# Altium PCB Relay Controller REV1.PcbDoc
Units mm, origin at the board's own origin, x right, y up, seen from the top; angles counter-clockwise.
Board outline 101.06 x 103.5 mm, 2 copper layers (Top Layer, Bottom Layer); 33 components, 25 nets, 100 pads, 146 vias.
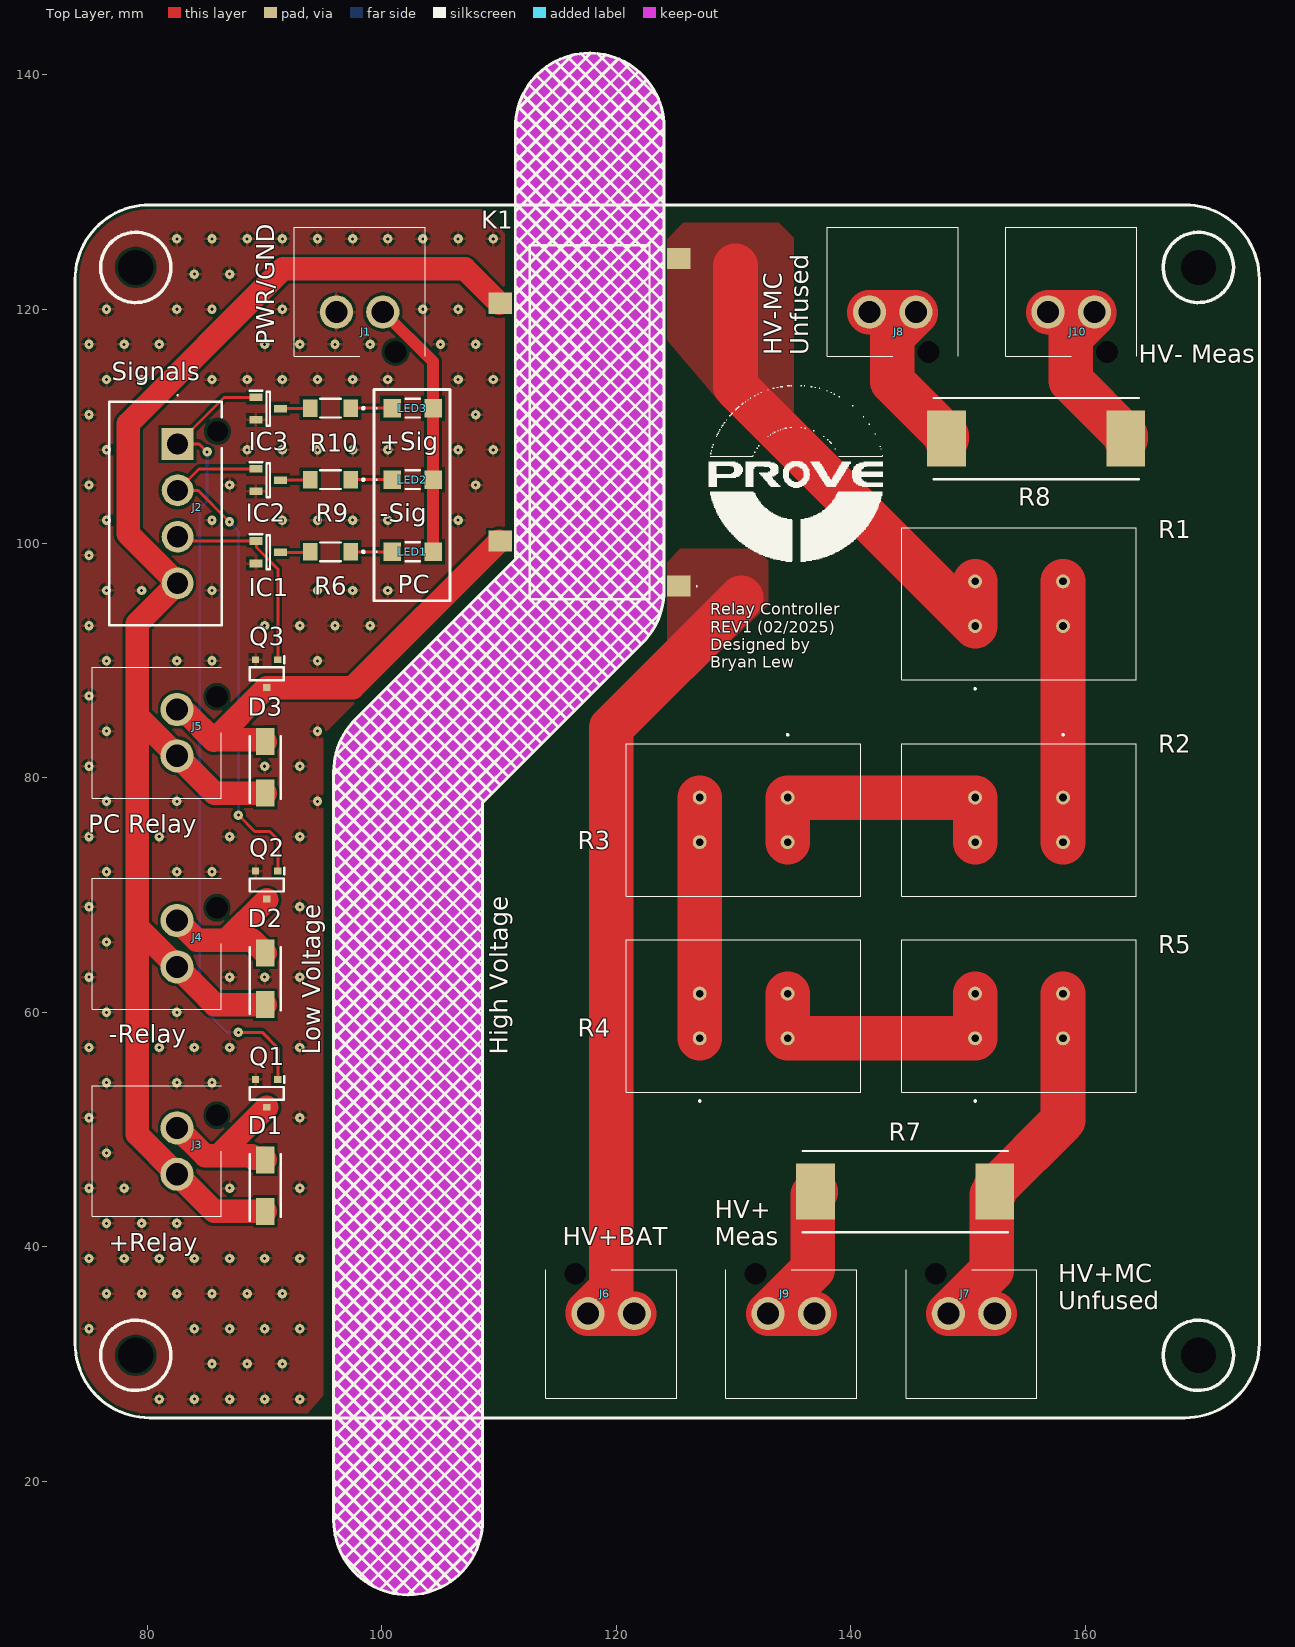
[diagram p0: Top Layer view]
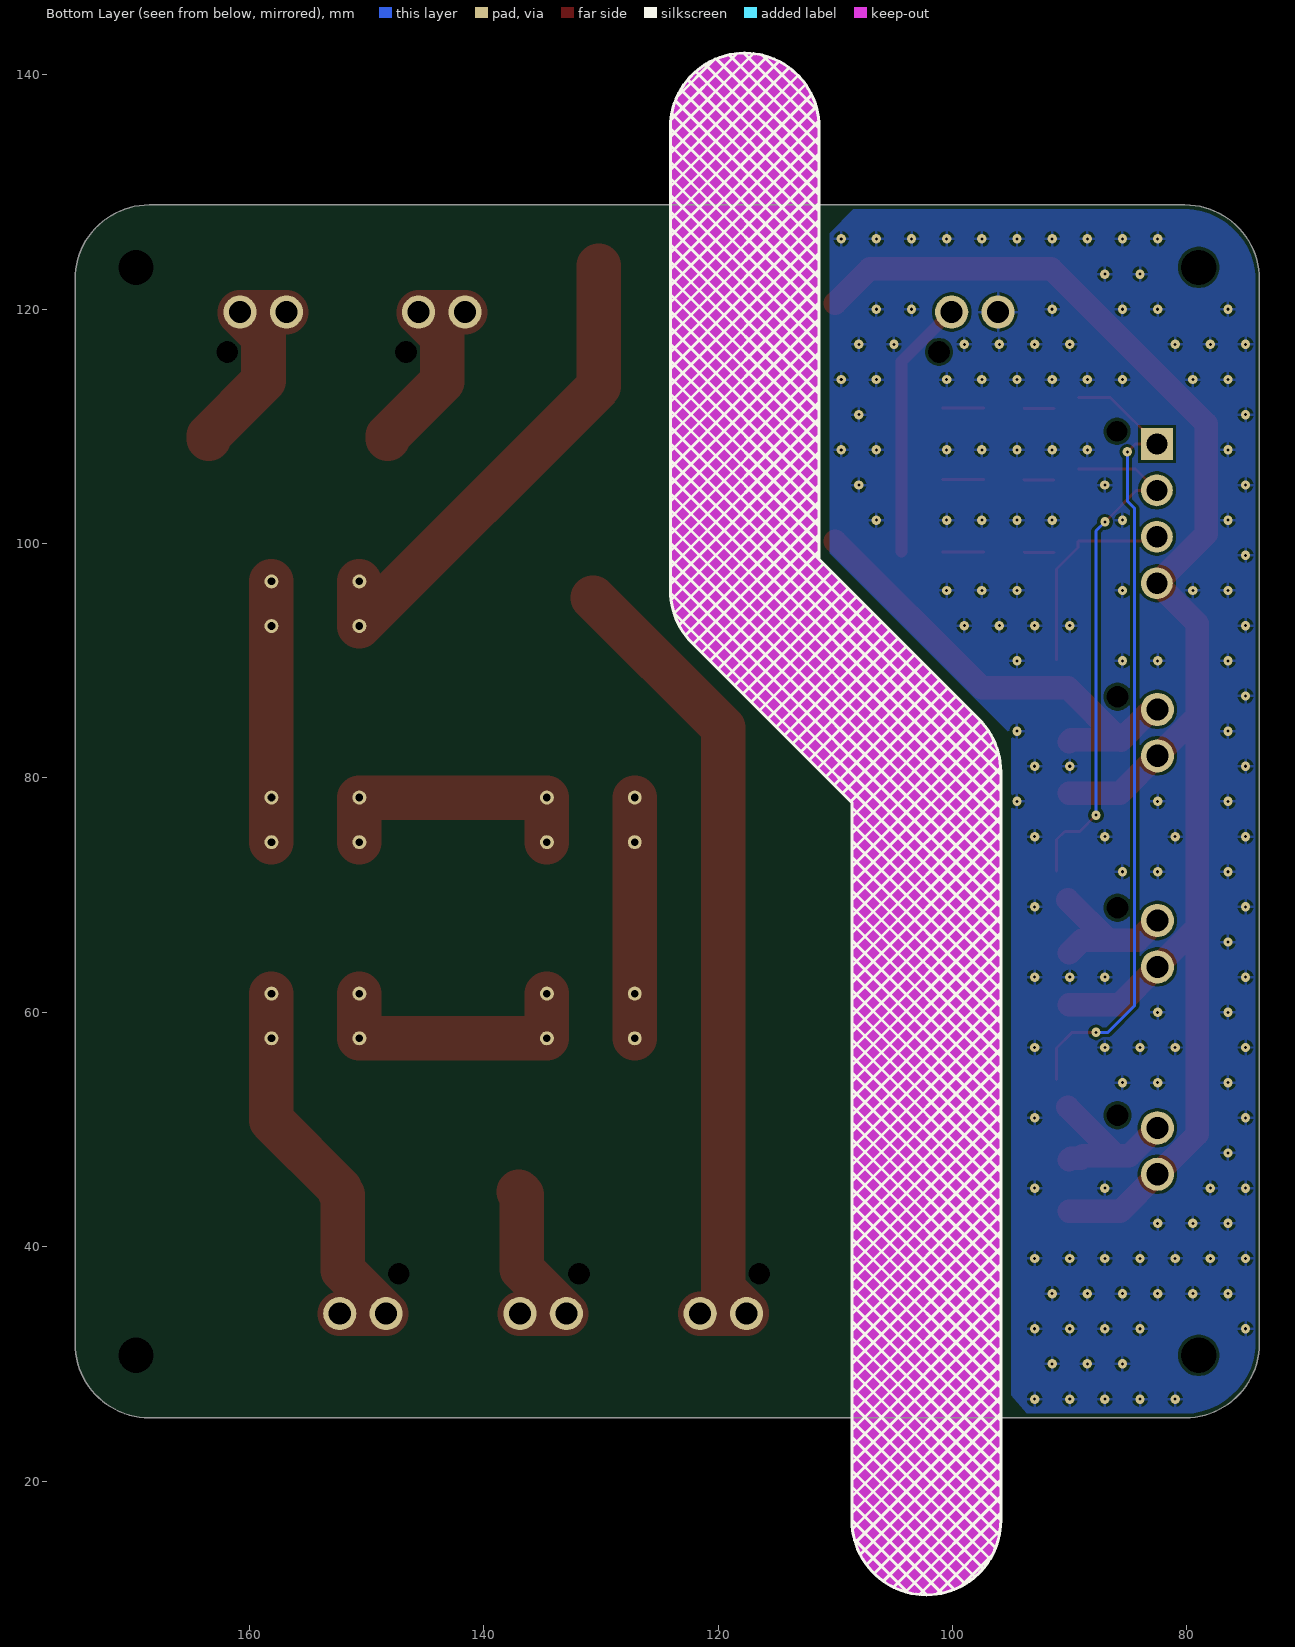
[diagram p1: Bottom Layer view, seen from below]
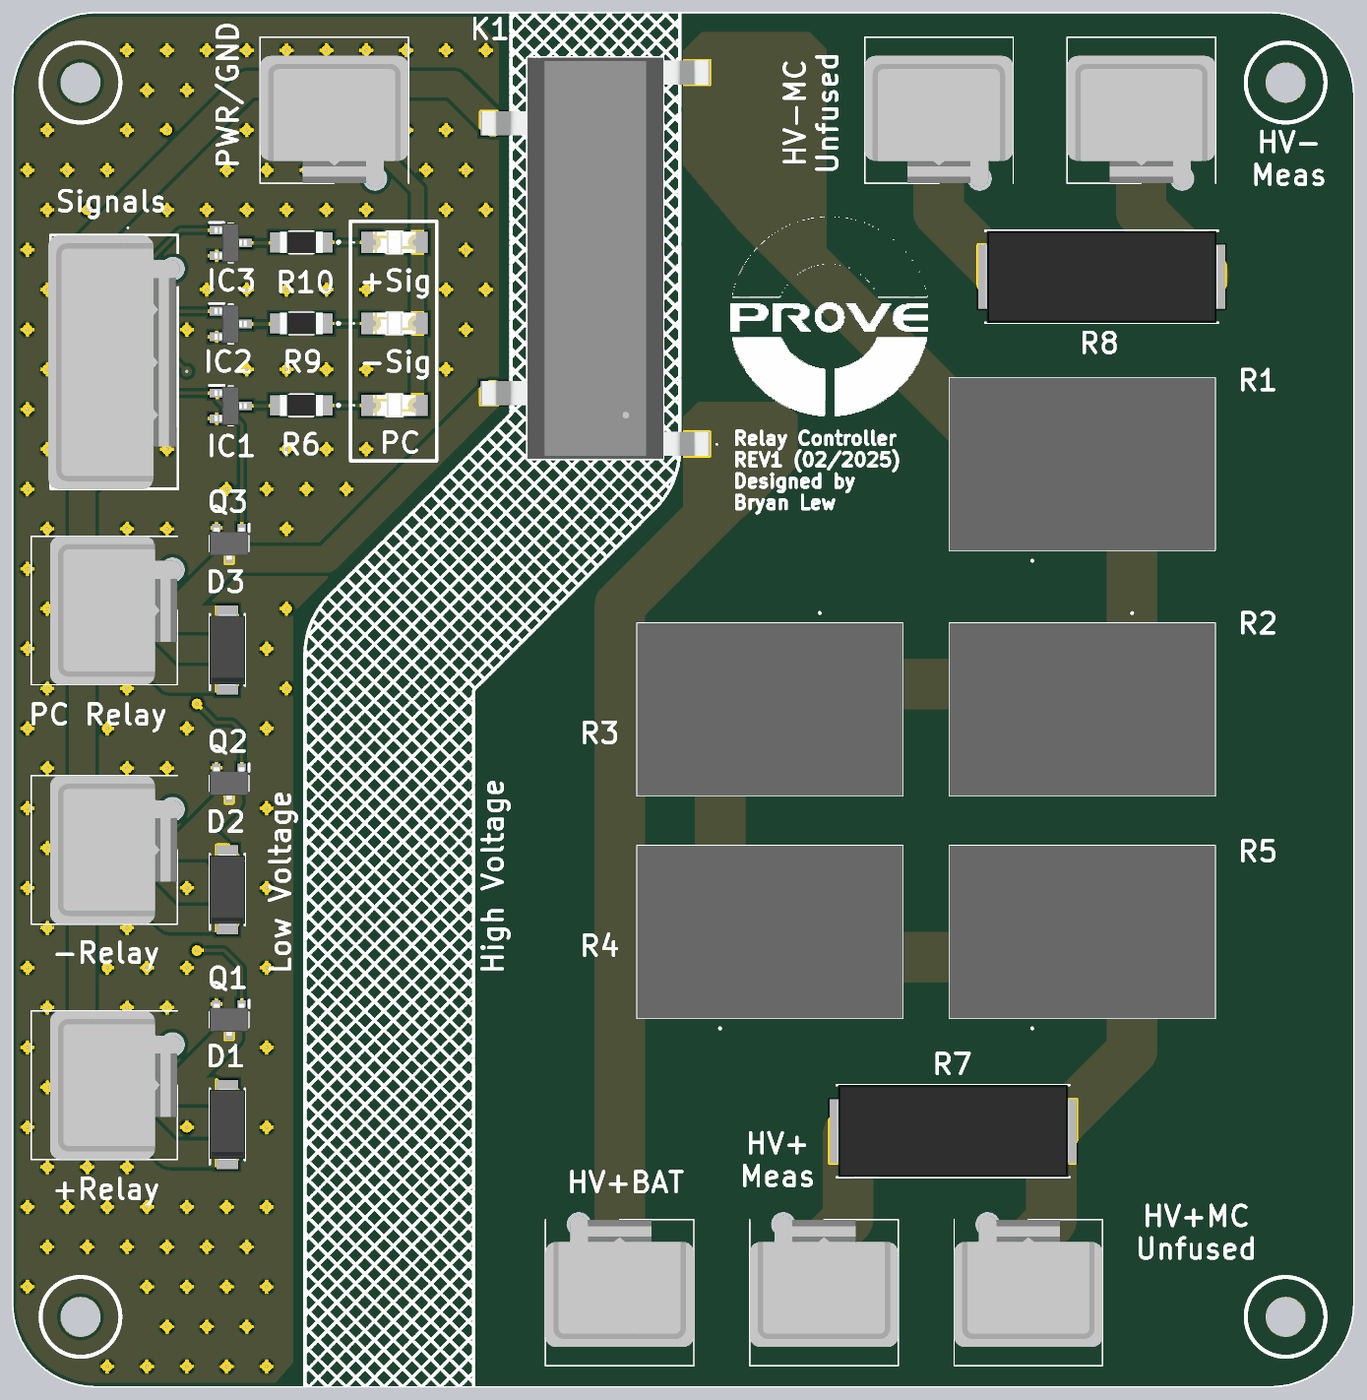
[diagram p2: 3D render of the assembled board from above, using the file's embedded part models]

## Layer stack, top to bottom
Top Solder: solder mask 0.0102, Solder Resist, Dk 3.5
Top Layer: signal copper 0.0356
Dielectric 1: dielectric 0.32, FR-4, Dk 4.8
Bottom Layer: signal copper 0.0356
Bottom Solder: solder mask 0.0102, Solder Resist, Dk 3.5

## Board outline
73.817,31.75 ccw(c80.167,31.75) 80.167,25.4 168.529,25.4 ccw(c168.529,31.75) 174.879,31.75 174.879,122.555 ccw(c168.529,122.555) 168.529,128.905 80.167,128.905 ccw(c80.167,122.555) 73.817,122.555

## Design rules (kind name [scope] priority, off if disabled: settings)
Clearance [InNetClass('All Nets')] p1: gap=0.254 ignorepadtopadclearanceinfootprint=FALSE
FabricationTestPointUsage TestPointUsage [All] p1: valid=0 allowmultiple=FALSE
FabricationTestpoint Testpoint [All] p1: side=3 testpointundercomponent=TRUE minsize=1.016 maxsize=2.54 preferedsize=1.524 minholesize=0.508 maxholesize=1.016 preferedholesize=0.813 testpointgrid=0.025 allowsidetop=TRUE allowsidebottom=TRUE usegrid=TRUE gridtolerance=0
HoleSize [All] p1: absolutevalues=TRUE maxlimit=6.274 minlimit=0.254 maxpercent=80.000 minpercent=20.000
PasteMaskExpansion PasteMaskExpansion_1 [InComponent('P1')] p1: expansion=-3.81
PasteMaskExpansion [All] p2: expansion=0
PlaneClearance [All] p1: clearance=0.127
PlaneConnect [All] p1: planeconnectstyle=Relief reliefexpansion=0.381 reliefentries=4 reliefconductorwidth=0.254 reliefairgap=0.254
PolygonConnect PolygonConnectPowerPads [InPolygonClass('PowerPolygons')] p1: connectstyle=Direct reliefconductorwidth=0.254 reliefentries=4 polygonreliefangle="90 Angle" airgapwidth=0.254
PolygonConnect [All] p2: connectstyle=Relief reliefconductorwidth=0.254 reliefentries=4 polygonreliefangle="90 Angle" airgapwidth=0.254
RoutingVias [All] p1: holewidth=0.381 width=0.762 viastyle="Through Hole" minholewidth=0.254 minwidth=0.508 maxholewidth=0.381 maxwidth=1.27
SilkToSolderMaskClearance SilkscreenOverComponentPads [IsPad] p1: minsilkscreentomaskgap=0.254 clearancetoexposedcopper=TRUE
SolderMaskExpansion [All] p1: expansion=0.127 istentingtop=FALSE
SupplyNets "Schematic Supply Nets" [InNet('GND')] p1: voltage=0.000
UnRoutedNet [All] p1: checkbadconnections=TRUE
Width [All] p1: maxlimit=3.81 minlimit=0.127 preferedwidth=0.254
22 further rules are at their usual default settings.

## Classes and differential pairs
polygon class PowerPolygons: HV+_BAT_L01_P003 NETK1_2_L01_P004
component class U_LED3: IC3 LED3 R10
component class U_LED2: IC2 LED2 R9
component class U_LED1: IC1 LED1 R6
channel class LED_Driver: U_LED1 U_LED2 U_LED3
component class "Relay Controller": D1 D2 D3 K1 Q1 Q2 Q3 R1 R2 R3 R4 R5
component class Connectors: J1 J2 J3 J4 J5 J6 J7 J8 J9 J10 R7 R8

## Components (designator, comment, footprint, x,y, rotation, side; value= is the part's Value field where it differs from the comment)
D1 "RGF1M-E3_67A" DIOM5426X300N 90.042,45.212 r90 top
D2 "RGF1M-E3_67A" DIOM5426X300N 90.042,62.865 r90 top
D3 "RGF1M-E3_67A" DIOM5426X300N 90.042,80.899 r90 top
IC1 "DMN61D8LQ-13" SOT96P240X110-3N 90.297,99.258 r0 top
IC2 "DMN61D8LQ-13" SOT96P240X110-3N 90.297,105.415 r0 top (schematic designator IC1)
IC3 "DMN61D8LQ-13" SOT96P240X110-3N 90.297,111.516 r0 top (schematic designator IC1)
J1 "1877285-2" 18772852 98.096,116.001 r180 top
J2 "1877285-4" 18772854 82.563,108.504 r270 top
J3 "1877285-2" 18772852 86.283,48.164 r270 top
J4 "1877285-2" 18772852 86.283,65.864 r270 top
J5 "1877285-2" 18772852 86.283,83.872 r270 top
J6 "1877285-2" 18772852 119.559,38.05 r0 top
J7 "1877285-2" 18772852 150.316,38.05 r0 top
J8 "1877285-2" 18772852 143.585,116.001 r180 top
J9 "1877285-2" 18772852 134.938,38.05 r0 top
J10 "1877285-2" 18772852 158.825,116.001 r180 top
K1 "KT12-1A-40L-SMD" KT121A40LSMD 117.729,110.363 r90 top
LED1 "156120VS75000" 156120VS75000 102.616,99.302 r0 top
LED2 "156120VS75000" 156120VS75000 102.616,105.456 r0 top (schematic designator LED1)
LED3 "156120VS75000" 156120VS75000 102.616,111.557 r0 top (schematic designator LED1)
Q1 "SSM3K357R,LF" SOTFL95P240X88-3N 90.17,53.086 r270 top
Q2 "SSM3K357R,LF" SOTFL95P240X88-3N 90.17,70.866 r270 top
Q3 "SSM3K357R,LF" SOTFL95P240X88-3N 90.17,88.9 r270 top
R1 "TWW20J100E" TWW20J100E 150.622,92.964 r0 top
R2 "TWW20J100E" TWW20J100E 158.122,78.33 r180 top
R3 "TWW20J100E" TWW20J100E 134.62,78.33 r180 top
R4 "TWW20J100E" TWW20J100E 127.12,57.785 r0 top
R5 "TWW20J100E" TWW20J100E 150.622,57.785 r0 top
R6 "ERA-8VEB4750V" ERA8KEB1004V 95.614,99.301 r180 top
R7 "PWR6927W1002FE" RESM17569X685N 144.653,44.704 r180 top
R8 "PWR6927W1002FE" RESM17569X685N 155.829,108.966 r0 top
R9 "ERA-8VEB4750V" ERA8KEB1004V 95.614,105.457 r180 top (schematic designator R6)
R10 "ERA-8VEB4750V" ERA8KEB1004V 95.614,111.558 r180 top (schematic designator R6)

## Footprints (in the part's own frame and the unit in brackets; to place one, negate y for a bottom-side part, rotate by r counter-clockwise, add the part's x,y. Pads: shape width x height; smd on the part's side, far side on the other; paste and mask are expansions set on the pad)
156120VS75000 [mm]
  rect 1.5x1.6 smd: 1(-1.75,0) 2(1.75,0)
  silkscreen extent -3.1,-0.8 0.6,0.8, body extent -1.6,-0.8 1.6,0.8, height 1.2
18772852 [mm]
  round 2.835 hole 1.89: 1(-1.98,-3.76) 2(1.98,-3.76)
  round 0.93 hole 1.86 unplated: 3(-3.06,-0.36)
  silkscreen extent -5.59,-11 5.58,0, body extent -5.59,-9.58 5.59,0.3, height 11.91
18772854 [mm]
  rect 2.715x2.715 hole 1.81: 1(0,0)
  round 2.715 hole 1.81: 2(3.96,0) 3(7.92,0) 4(11.88,0)
  round 0.89 hole 1.78 unplated: 5(-1.08,3.4)
  silkscreen extent -4.2,-5.82 15.48,3.77, body extent -3.58,-5.99 15.51,3.9, height 11.86
DIOM5426X300N [mm]
  rect 2.3x1.6 smd: 1(-2.2,0) 2(2.2,0)
  silkscreen extent -3,-1.32 2.68,1.32, body extent -2.68,-1.32 2.68,1.32, height 3
ERA8KEB1004V [mm]
  rect 1.25x1.5 smd: 1(-1.725,0) 2(1.725,0)
  silkscreen extent -2.9,-0.8 0.9,0.8, body extent -1.6,-0.8 1.6,0.8, height 0.65
KT121A40LSMD [mm]
  rect 1.8x2 smd: 1(-13.97,-7.62) 2(13.97,-7.62) 3(10.15,7.62) 4(-10.15,7.62)
  silkscreen extent -15.1,-9.2 15.1,5.1, body extent -15.1,-8.5 15.1,8.5, height 8.71
RESM17569X685N [mm]
  rect 3.3x4.8 smd: 1(-7.65,0) 2(7.65,0)
  silkscreen extent -8.75,-3.46 8.75,3.46, body extent -8.75,-3.46 8.75,3.46, height 6.85
SOT96P240X110-3N [mm]
  rect 1.1x0.65 smd: 1(-1.05,0.96) 2(-1.05,-0.96) 3(1.05,0)
  silkscreen extent -1.6,-1.45 0.15,1.53, body extent -1.2,-1.45 1.2,1.45, height 1.1
SOTFL95P240X88-3N [mm]
  rect 0.575x0.62 smd: 1(-1.188,0.95) 2(-1.188,-0.95) 3(1.188,0)
  silkscreen extent -1.47,-1.45 0.55,1.51, body extent -1.2,-1.45 1.2,1.45, height 0.88
TWW20J100E [mm]
  round 1.192 hole 0.65: 1(0,0) 2(7.5,0) 3(7.5,3.81) 4(0,3.81)
  silkscreen extent -6.25,-5.4 13.75,8.41, body extent -6.25,-4.59 13.75,8.4, height 46.1

## Part data
D1 D2 D3: "Diode", Arrow Part Number=RGF1M-E3/67A, Manufacturer_Name=Vishay, Mouser Part Number=625-RGF1M-E3, Arrow Price/Stock=https://www.arrow.com/en/products/rgf1m-e367a/vishay?region=nac, Datasheet Link=https://www.vishay.com/docs/88697/rgf1.pdf, Height=3mm, Manufacturer_Part_Number=RGF1M-E3/67A, Mouser Price/Stock=https://www.mouser.co.uk/ProductDetail/Vishay-General-Semiconductor/RGF1M-E3-67A?qs=4xyK702%2F%252BQ1dl%252BTCdyIThg%3D%3D
IC1 IC2 IC3: "Integrated Circuit", Manufacturer_Name="Diodes Incorporated", Mouser Part Number=621-DMN61D8LQ-13, Arrow Part Number=DMN61D8LQ-13, Arrow Price/Stock=https://www.arrow.com/en/products/dmn61d8lq-13/diodes-incorporated?utm_currency=USD&region=nac, Datasheet Link=https://www.diodes.com//assets/Datasheets/DMN61D8LQ.pdf, Height=1.1mm, Manufacturer_Part_Number=DMN61D8LQ-13, Mouser Price/Stock=https://www.mouser.co.uk/ProductDetail/Diodes-Incorporated/DMN61D8LQ-13?qs=DBvH5xl4UymJgoulTjiNCg%3D%3D
J1 J3 J4 J5 J6 J7 J8 J9 J10: "Connector", Manufacturer_Name="TE Connectivity", Mouser Part Number=571-1877285-2, Arrow Part Number=1877285-2, Arrow Price/Stock=https://www.arrow.com/en/products/1877285-2/te-connectivity?region=europe, Datasheet Link=https://www.te.com/commerce/DocumentDelivery/DDEController?Action=srchrtrv&DocNm=7-1773458-5_ECONOMY_POWER_QRG&DocType=Data%20Sheet&DocLang=English&PartCntxt=1877285-2&DocFormat=pdf, Height=12mm, Manufacturer_Part_Number=1877285-2, Mouser Price/Stock=https://www.mouser.co.uk/ProductDetail/TE-Connectivity/1877285-2?qs=ka3zfMQDmFlAIZq5pDt5JA%3D%3D
J2: "Connector", Manufacturer_Name="TE Connectivity", Mouser Part Number=571-1877285-4, Arrow Part Number=1877285-4, Arrow Price/Stock=https://www.arrow.com/en/products/1877285-4/te-connectivity?region=nac, Datasheet Link=https://www.te.com/commerce/DocumentDelivery/DDEController?Action=srchrtrv&DocNm=1877285&DocType=Customer%20Drawing&DocLang=English&PartCntxt=1877285-4&DocFormat=pdf, Height=12.5mm, Manufacturer_Part_Number=1877285-4, Mouser Price/Stock=https://www.mouser.co.uk/ProductDetail/TE-Connectivity/1877285-4?qs=ka3zfMQDmFkZPBtotDIXvQ%3D%3D
K1: "Relay or Contactor", Manufacturer_Name=STANDEXMEDER, Mouser Part Number=876-KT12-1A-40L-SMD, Arrow Part Number=KT12-1A-40L-SMD, Arrow Price/Stock=https://www.arrow.com/en/products/kt12-1a-40l-smd/standex-meder-electronics, Datasheet Link=https://standexelectronics.com/resources/technical-library/technical-papers/datasheet-kt-series-reed-relay/, Height=8.7mm, Manufacturer_Part_Number=KT12-1A-40L-SMD
LED1 LED2 LED3: "LED", Manufacturer_Name="Wurth Elektronik", Mouser Part Number=710-156120VS75000, Datasheet Link=https://www.we-online.com/components/products/datasheet/156120VS75000.pdf, Height=1.3mm, Manufacturer_Part_Number=156120VS75000, Mouser Price/Stock=https://www.mouser.co.uk/ProductDetail/Wurth-Elektronik/156120VS75000?qs=2kOmHSv6VfQAUFg5BeuEfQ%3D%3D
Q1 Q2 Q3: "MOSFET (N-Channel)", Manufacturer_Name=Toshiba, Mouser Part Number=757-SSM3K357RLF, Arrow Part Number=SSM3K357R,LF, Arrow Price/Stock=https://www.arrow.com/en/products/ssm3k357rlf/toshiba?utm_currency=USD&region=nac, Datasheet Link=https://toshiba.semicon-storage.com/info/docget.jsp?did=59207&prodName=SSM3K357R, Height=0.88mm, Manufacturer_Part_Number=SSM3K357R,LF, Mouser Price/Stock=https://www.mouser.co.uk/ProductDetail/Toshiba/SSM3K357RLF?qs=F5EMLAvA7ICLn4Y138U4bA%3D%3D
R1 R2 R3 R4 R5: "Resistor", Manufacturer_Name=Ohmite, Mouser Part Number=588-TWW20J100E, Datasheet Link=https://www.mouser.in/datasheet/2/303/res_tww_twm-1228653.pdf, Height=46mm, Manufacturer_Part_Number=TWW20J100E, Mouser Price/Stock=https://www.mouser.co.uk/ProductDetail/Ohmite/TWW20J100E?qs=PzGy0jfpSMsE3rbWfgqD2A%3D%3D
R6 R9 R10: "475 ohm resistor", Manufacturer_Name=Panasonic, Mouser Part Number=667-ERA-8VEB4750V, Datasheet Link=https://industrial.panasonic.com/cdbs/www-data/pdf/RDM0000/RDM0000C331.pdf, Height=0.65mm, Manufacturer_Part_Number=ERA-8VEB4750V, Mouser Price/Stock=https://www.mouser.co.uk/ProductDetail/Panasonic/ERA-8VEB4750V?qs=By6Nw2ByBD36LBLC0KPpEw%3D%3D
R7 R8: "Resistor", Manufacturer_Name=Bourns, Mouser Part Number=652-PWR6927W1002FE, Datasheet Link=https://www.bourns.com/docs/Product-Datasheets/PWR6927_8030_8937_A247_B053.pdf, Height=6.85mm, Manufacturer_Part_Number=PWR6927W1002FE, Mouser Price/Stock=https://www.mouser.co.uk/ProductDetail/Bourns/PWR6927W1002FE?qs=NeOn4crkEusWUfkTem4h9g%3D%3D

## Free pads (board coordinates)
  round 1.524 hole 3: 1(78.994,30.734) 1(78.994,123.571) 1(169.672,30.734) 1(169.672,123.571)

## Via types
v1: diameter 0.8, hole 0.26, Top Layer to Bottom Layer, 145 vias
v2: diameter 0.8, hole 0.26, Top Layer to Bottom Layer, tented top, 1 vias

## Nets (pads, with @x,y where several pads share a name; then routed paths per layer and width w, separated by ;. In a path a pad name is that pad's centre, name@x,y a point inside that pad or via, vN(x,y) a via of type N, cw(c..) or ccw(c..) an arc to the next point about the centre after c; other vN are vias at no path point)
"+ Relay GND": D1.2 J3.1 Q1.3 | length 14.5
  Top Layer w2: J3.1 84.915,47.752 86.024,47.752 ; D1.2 89.892,47.562 89.073,47.562 88.883,47.752 86.024,47.752 ; Q1.3 86.024,47.752
"+ Signal": IC3.1 J2.1 Q1.1 | length 69.5
  Top Layer w0.254: v1(85.09,107.823) 84.409,108.504 J2.1 86.535,112.476 IC3.1 ; v1(87.757,58.293) 89.789,58.293 91.12,56.962 Q1.1
  Bottom Layer w0.254: v1(85.09,107.823) 85.09,103.632 84.455,102.997 84.455,60.579 86.741,58.293 v1(87.757,58.293)
"- Relay GND": D2.2 J4.1 Q2.3 | length 13.6
  Top Layer w1: Q2.3@90.17,69.596 Q2.3
  Top Layer w2: J4.1 84.2,66.167 86.741,66.167 ; D2.2 88.94,66.167 86.741,66.167 ; Q2.3@90.17,69.596 86.741,66.167
"- Signal": IC2.1 J2.2 Q2.1 | length 45.2
  Top Layer w0.254: v2(86.995,101.854) 84.305,104.544 J2.2 84.394,106.375 IC2.1 ; v1(87.757,76.835) 89.154,75.438 90.424,75.438 91.12,74.742 Q2.1
  Bottom Layer w0.254: v2(86.995,101.854) 87.757,101.092 v1(87.757,76.835)
GND: IC1.2 IC2.2 IC3.2 J1.2 Q1.2 Q2.2 Q3.2
  other v1: 81,27 84,27 87,27 90,27 93,27 85.5,30 88.5,30 91.5,30 75,33 84,33 87,33 90,33 93,33 76.5,36 79.5,36 82.5,36 85.5,36 88.5,36 91.5,36 75,39 78,39 81,39 84,39 87,39 90,39 93,39 76.5,42 79.5,42 82.5,42 75,45 78,45 87,45 93,45 76.5,48 75,51 93,51 76.5,54 82.5,54 85.5,54 75,57 81,57 84,57 87,57 93,57 76.5,60 82.5,60 75,63 87,63 90,63 93,63 76.5,66 75,69 93,69 76.5,72 82.5,72 85.5,72 75,75 81,75 87,75 93,75 76.5,78 82.5,78 94.5,78 75,81 90,81 93,81 76.5,84 94.5,84 75,87 76.5,90 82.5,90 85.5,90 94.5,90 75,93 90,93 93,93 96,93 99,93 76.5,96 79.5,96 85.5,96 94.5,96 97.5,96 100.5,96 75,99 76.5,102 85.5,102 91.5,102 94.5,102 97.5,102 100.5,102 106.5,102 75,105 87,105 108,105 76.5,108 88.5,108 91.5,108 94.5,108 97.5,108 100.5,108 106.5,108 109.5,108 75,111 108,111 76.5,114 79.5,114 85.5,114 88.5,114 91.5,114 94.5,114 97.5,114 100.5,114 106.5,114 109.5,114 75,117 78,117 81,117 90,117 93,117 96,117 99,117 105,117 108,117 76.5,120 82.5,120 85.5,120 91.5,120 103.5,120 106.5,120 84,123 87,123 82.5,126 85.5,126 88.5,126 91.5,126 94.5,126 97.5,126 100.5,126 103.5,126 106.5,126 109.5,126
"HV+ BAT": J6.1 J6.2 K1.1 | length 70.5
  Top Layer w3.8: J6.2 J6.1 117.579,34.409 119.583,36.413 119.583,84.277 130.683,95.377
"HV+ MC Unfused": J7.1 J7.2 R5.2 R5.3 R7.1 | length 35.3
  Top Layer w3.8: J7.2 J7.1 152.053,38.007 152.053,44.454 R7.1 152.303,44.954 158.122,50.773 R5.2 R5.3
"HV+ Measure": J9.1 J9.2 R7.2 | length 16
  Top Layer w3.8: J9.2 J9.1 136.753,38.085 136.753,44.454 R7.2
"HV- MC Unfused": J8.1 J8.2 R8.1 | length 17.5
  Top Layer w3.8: J8.2 J8.1 145.565,119.642 143.561,117.638 143.561,113.834 148.179,109.216 R8.1
"HV- Measure": J10.1 J10.2 R8.2 | length 17.5
  Top Layer w3.8: J10.2 J10.1 160.805,119.642 158.801,117.638 158.801,113.894 163.479,109.216 R8.2
NetIC1_3: IC1.3 R6.2 | length 2.6
  Top Layer w0.254: IC1.3 93.846,99.258 R6.2
NetIC2_3: IC2.3 R9.2 | length 2.6
  Top Layer w0.254: IC2.3 93.846,105.415 R9.2
NetIC3_3: IC3.3 R10.2 | length 2.6
  Top Layer w0.254: IC3.3 93.846,111.516 R10.2
NetK1_2: K1.2 R1.1 R1.4 | length 43
  Top Layer w3.8: 130.175,123.698 130.175,113.411 R1.1 R1.4
NetLED1_1: LED1.1 R6.1 | length 3.5
  Top Layer w0.254: R6.1 100.864,99.301 LED1.1
NetLED2_1: LED2.1 R9.1 | length 3.5
  Top Layer w0.254: R9.1 100.864,105.457 LED2.1
NetLED3_1: LED3.1 R10.1 | length 3.5
  Top Layer w0.254: R10.1 100.864,111.558 LED3.1
NetR1_2: R1.2 R1.3 R2.1 R2.4 | length 22.3
  Top Layer w3.8: R2.4 R2.1 R1.2 R1.3
NetR2_2: R2.2 R2.3 R3.1 R3.4 | length 23.6
  Top Layer w3.8: R3.4 R3.1 R2.2 R2.3
NetR3_2: R3.2 R3.3 R4.1 R4.4 | length 20.5
  Top Layer w3.8: R4.1 R4.4 R3.3 R3.2
NetR4_2: R4.2 R4.3 R5.1 R5.4 | length 23.6
  Top Layer w3.8: R4.3 R4.2 R5.1 R5.4
"Precharge Relay GND": D3.2 J5.1 K1.4 Q3.3 | length 40.4
  Top Layer w1: J5.1 82.909,85.852 J5.1@83.02,85.852 ; K1.4@110.009,100.213 K1.4
  Top Layer w2: J5.1@82.909,85.852 82.909,85.692 83.166,85.435 83.437,85.435 85.623,83.249 85.707,83.249 ; 85.665,83.207 85.707,83.249 ; D3.2 89.892,83.249 85.707,83.249 ; K1.4@110.009,100.213 97.508,87.712 Q3.3 85.707,83.249
"Precharge Signal": IC1.1 J2.3 Q3.1 | length 17.7
  Top Layer w0.254: J2.3 82.929,100.218 IC1.1 89.298,100.167 89.298,99.661 89.767,99.191 91.12,97.839 Q3.1
"Ready Signal": D1.1 D2.1 D3.1 J2.4 J3.2 J4.2 J5.2 K1.3 | length 143.2
  Top Layer w1: K1.3@110.009,120.513 K1.3
  Top Layer w2: D1.1 85.695,43.012 J3.2 79.121,49.586 79.121,67.286 ; D2.1 85.742,60.665 J4.2 79.121,67.286 ; D3.1 85.716,78.699 J5.2 79.121,85.294 ; K1.3@110.009,120.513 107.078,123.444 91.567,123.444 78.359,110.236 78.359,100.828 J2.4 79.121,93.182 79.121,85.294 ; 79.121,67.286 79.121,85.294
VDD: J1.1 LED1.2 LED2.2 LED3.2 | length 22.3
  Top Layer w1: J1.1 100.138,119.761 104.366,115.533 LED3.2 LED2.2 LED1.2
pads on no net: J1.3 J2.5 J3.3 J4.3 J5.3 J6.3 J7.3 J8.3 J9.3 J10.3

## Polygon pours and split planes (outlines as drawn)
no net on Top Overlay "NONET_L02_P002" (hatched 45Degree grid 1 track 0.254, pour order 2): 95.885,16.637 95.885,80.518 cw(c102.235,80.518) 97.745,85.009 97.745,85.008 111.379,98.642 111.379,135.509 cw(c117.729,135.509) 124.079,135.509 124.079,96.012 cw(c117.729,96.012) 122.219,91.521 122.219,91.522 108.585,77.888 108.585,16.637 cw(c102.235,16.637)
GND on Top Layer "GND_L01_P008" (solid, pour order 8): 74.168,31.399 ccw(c80.288,31.901) 79.786,25.781 93.675,25.781 94.996,27.305 94.996,83.693 110.49,99.187 110.49,126.492 108.458,128.524 79.786,128.524 ccw(c80.288,122.404) 74.168,122.906
NetK1_2 on Top Layer "NETK1_2_L01_P004" (solid, pour order 4): 124.333,125.984 124.333,117.348 128.651,112.268 135.128,111.125 135.128,117.348 135.128,126.111 133.858,127.381 125.73,127.381
"HV+ BAT" on Top Layer "HV+_BAT_L01_P003" (solid, remove dead copper, pour order 3): 124.333,92.202 124.333,89.662 125.73,87.884 132.969,94.742 132.969,98.552 131.953,99.568 125.476,99.568 124.333,98.425
no net on Bottom Overlay "NONET_L02_P000" (hatched 45Degree grid 1 track 0.254, pour order 0): 95.885,16.637 95.885,80.518 cw(c102.235,80.518) 97.745,85.009 97.745,85.008 111.379,98.642 111.379,135.509 cw(c117.729,135.509) 124.079,135.509 124.079,96.012 cw(c117.729,96.012) 122.219,91.521 122.219,91.522 108.585,77.888 108.585,16.637 cw(c102.235,16.637)
GND on Bottom Layer "GND_L02_P006" (solid, pour order 6): 74.168,31.399 ccw(c80.288,31.901) 79.786,25.781 93.675,25.781 94.996,27.305 94.996,83.693 110.49,99.187 110.49,126.492 108.458,128.524 79.786,128.524 ccw(c80.288,122.404) 74.168,122.906

## Keep-outs
Keep-Out Layer:
  lines w12.7: 102.235,16.637 102.235,25.4 102.235,80.518 117.729,96.012 117.729,128.905 117.729,135.509

## Silkscreen, mask and mechanical layers (free items; w line width, h text height)
Top Overlay:
  drawing of 100 lines, arcs and shapes, not listed
  text "PWR/GND" at 90.805,116.967 h1.52 r90
  text "HV-MC / Unfused" at 136.398,116.08 h1.52 r90
  text "HV- Meas" at 164.594,115.443 h1.52
  text "Signals" at 76.962,113.919 h1.52
  text "+Sig" at 99.822,107.95 h1.52
  text "-Sig" at 99.822,101.854 h1.52
  text "PC" at 101.346,95.758 h1.52
  text "Relay Controller / REV1 (02/2025) / Designed by / Bryan Lew" at 128.019,89.408 h1
  text "PC Relay" at 74.93,75.311 h1.52
  text "-Relay" at 76.708,57.404 h1.52
  text "Low Voltage" at 94.742,56.388 h1.52 r90
  text "High Voltage" at 110.744,56.388 h1.52 r90
  text "HV+BAT" at 115.443,40.132 h1.52
  text "HV+ / Meas" at 128.398,40.132 h1.52
  text "+Relay" at 76.708,39.624 h1.52
  text "HV+MC / Unfused" at 157.736,34.671 h1.52